# Altium PCB Main_card.PcbDoc
Units mm, origin at the board's own origin, x right, y up, seen from the top; angles counter-clockwise.
Board outline 164 x 114 mm, 2 copper layers (Top Layer, Bottom Layer); 68 components, 48 nets, 291 pads, 119 vias.
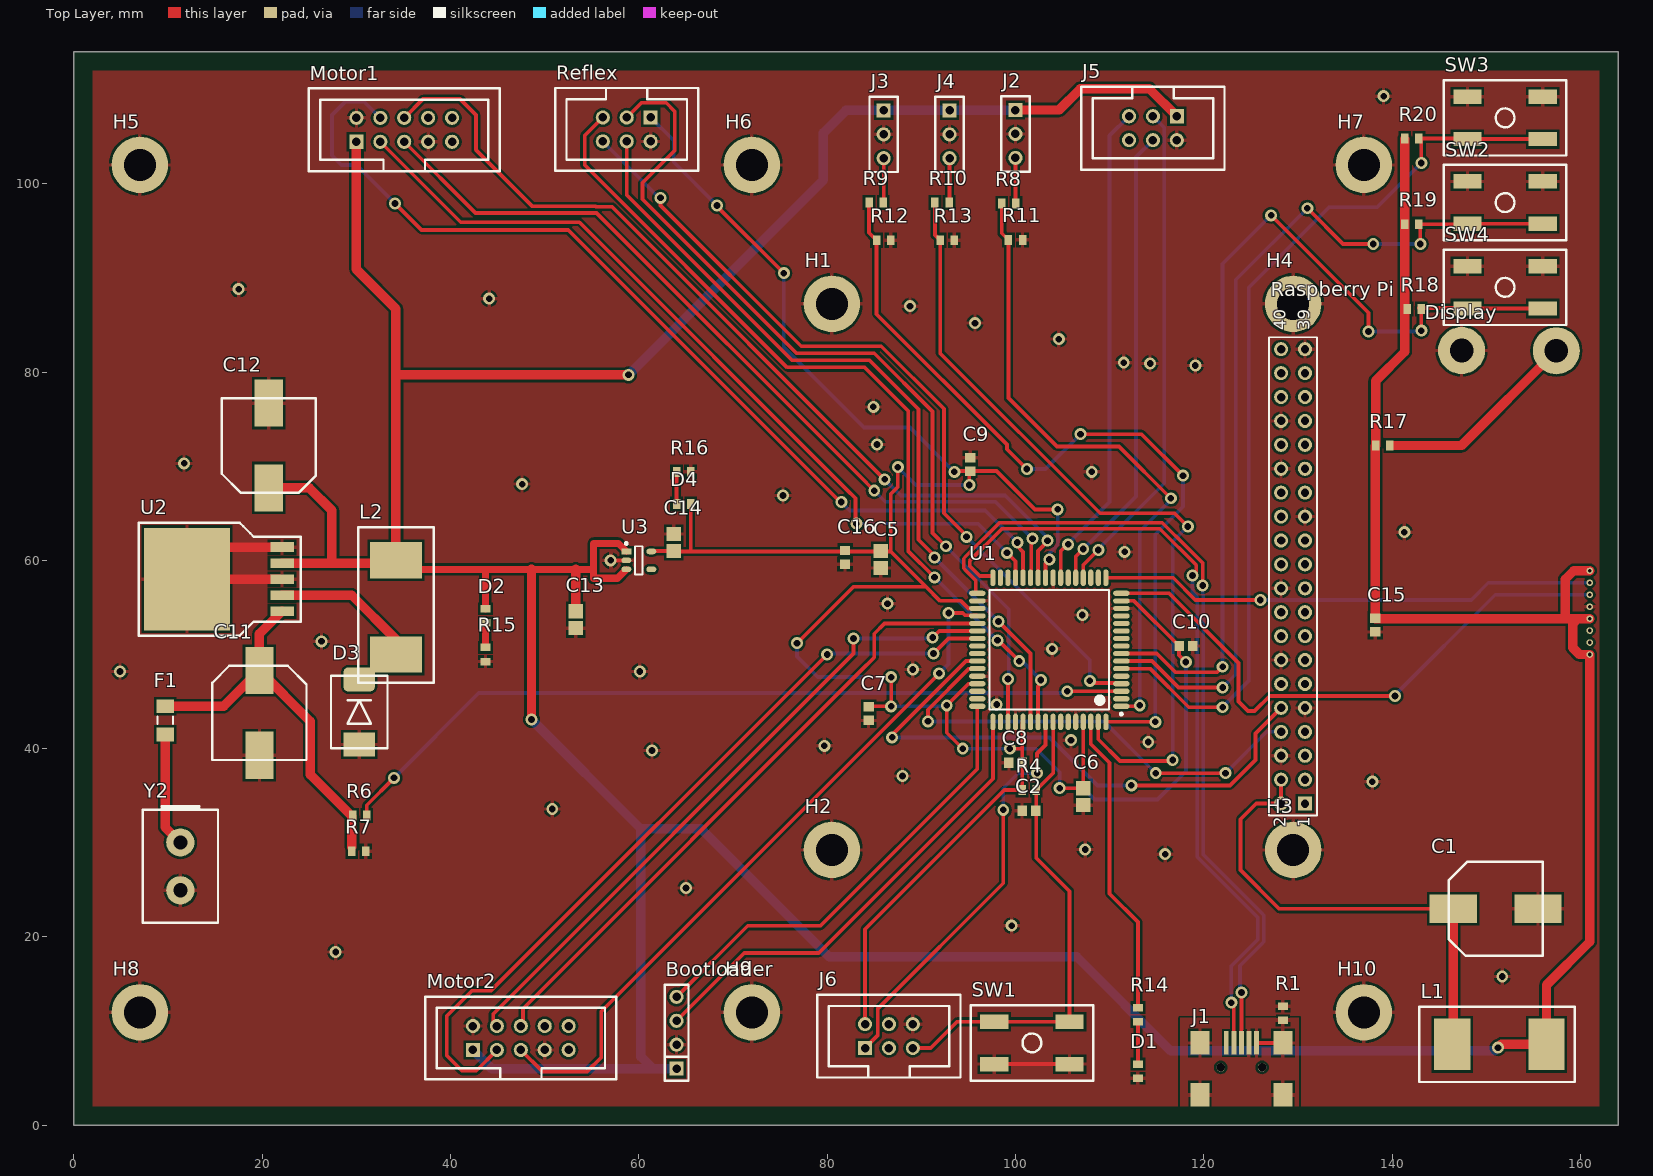
[diagram p0: Top Layer view]
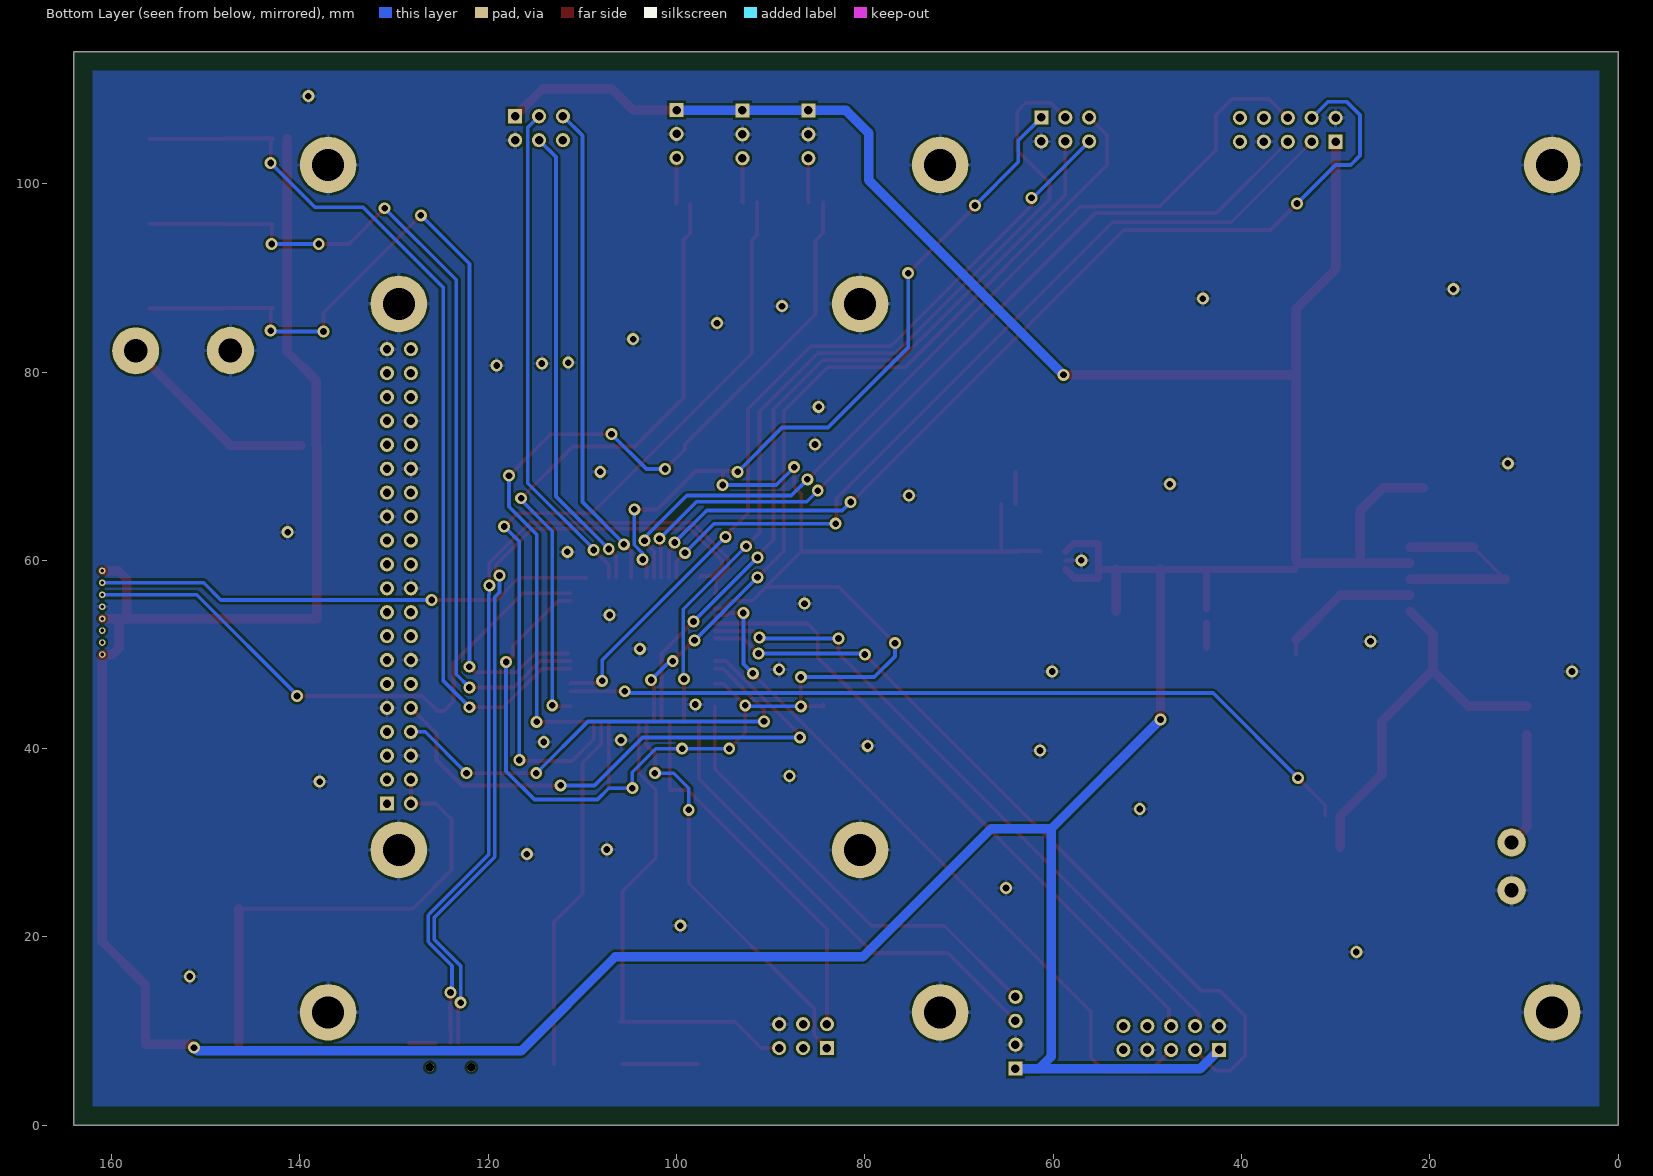
[diagram p1: Bottom Layer view, seen from below]

## Layer stack, top to bottom
Top Solder: solder mask 0.0102, Solder Resist, Dk 3.5
Top Layer: signal copper 0.0356
Dielectric1: dielectric 0.32, FR-4, Dk 4.8
Bottom Layer: signal copper 0.0356
Bottom Solder: solder mask 0.0102, Solder Resist, Dk 3.5

## Board outline
0,0 0,114 164,114 164,0

## Design rules (kind name [scope] priority, off if disabled: settings)
BoardOutlineClearance [All] p1: gap=2
Clearance [All] p1: gap=0.25
ComponentClearance [All] p1: gap=0.2 collisioncheckmode=3 verticalgap=0.2 showdistances=TRUE
DiffPairsRouting [All] p1: maxlimit=0.254 minlimit=0.254 mostfreqgap=0.254 toplayer_minwidth=0.381 toplayer_maxwidth=0.381 toplayer_prefwidth=0.381 bottomlayer_minwidth=0.381 bottomlayer_maxwidth=0.381 bottomlayer_prefwidth=0.381 maxuncoupledlength=12.7
FabricationTestPointUsage TestPointUsage [All] p1: valid=0 allowmultiple=FALSE
FabricationTestpoint Testpoint [All] p1: side=3 testpointundercomponent=TRUE minsize=1.016 maxsize=2.54 preferedsize=1.524 minholesize=0 maxholesize=1.016 preferedholesize=0.813 testpointgrid=0.025 allowsidetop=TRUE allowsidebottom=TRUE usegrid=TRUE gridtolerance=0
HoleSize [All] p1: absolutevalues=TRUE maxlimit=5 minlimit=0.025 maxpercent=80.000 minpercent=20.000
MatchedLengths [InDifferentialPair('D')] p1: tolerance=5 checknetsindiffpair=FALSE checkdiffpairvsdiffpair=TRUE checkxsignals=TRUE checkothers=TRUE
PlaneConnect [All] p1: planeconnectstyle=Relief reliefexpansion=0.508 reliefentries=4 reliefconductorwidth=0.4 reliefairgap=0.254
PolygonConnect [All] p1: connectstyle=Relief reliefconductorwidth=0.4 reliefentries=4 polygonreliefangle="90 Angle" airgapwidth=0.254
RoutingVias [All] p1: holewidth=0.711 width=1.27 viastyle="Through Hole" minholewidth=0.711 minwidth=1.27 maxholewidth=0.711 maxwidth=1.27
SilkToSolderMaskClearance SilkscreenOverComponentPads [IsPad] p1: minsilkscreentomaskgap=0.254 clearancetoexposedcopper=TRUE
SolderMaskExpansion [All] p1: expansion=0.102
Width Width_powah [InNet('5V') or InNet('VBAT')] p1: maxlimit=5 minlimit=0.25 preferedwidth=1
Width [All] p2: maxlimit=5 minlimit=0.25 preferedwidth=0.4
23 further rules are at their usual default settings.

## Classes and differential pairs
component class Main: Bootloader C1 C2 C5 C6 C7 C8 C9 C10 C11 C12 C13 C14 C16 D1 D2 D3 D4 F1 H1 H2 H3 H4 J1 J2 J3 J4 J6 L1 L2 Motor1 Motor2 R1 R4 R6 R7 R8 R9 R10 R11 R12 R13 R14 R15 R16 "Raspberry Pi" Reflex SW1 U2 U3 Y2
component class Display: C15 Display H5 H6 H7 H8 H9 H10 J5 R17 R18 R19 R20 SW2 SW3 SW4
differential pair D: +D_P -D_N

## Components (designator, comment, footprint, x,y, rotation, side; value= is the part's Value field where it differs from the comment)
Bootloader "HDR1X4" HEADER_1X4 64,9.83 r90 top
C1 "330u" CAP_FAT 151,23 r180 top
C2 "CAP" CAPC1608X08M 101.425,33.4 r0 top
C5 "CAP" CAPC2012X11M 85.7,60.1 r90 top
C6 "CAP" CAPC2012X11M 107.2,34.9 r90 top
C7 "CAP" CAPC1608X08M 84.4,43.725 r90 top
C8 "CAP" CAPC1608X08M 100.025,38.5 r0 top
C9 "CAP" CAPC1608X08M 95.2,70.175 r270 top
C10 "CAP" CAPC1608X08M 118.1,50.9 r180 top
C11 "680u" CAP_FAT 19.7,43.8 r90 top
C12 "330u" CAP_FAT 20.7,72.2 r270 top
C13 "CAP" CAPC2012X11M 53.3,53.7 r90 top
C14 "CAP" CAPC2012X11M 63.7,61.9 r270 top
C15 "CAP" CAPC1608X08M 138.2,53.125 r90 top
C16 "CAP" CAPC1608X08M 81.9,60.325 r90 top
D1 "RED" RESC1608X06M 113,5.75 r270 top
D2 "RED" RESC1608X06M 43.7,54.1 r270 top
D3 "B530C" Diode_B530C 30.3,43.9 r90 top
D4 "RED" RESC1608X06M 64.75,66 r180 top
Display "midasdisp" DISPLAY 176.875,52.54 r90 top
F1 "POLYFUSE" RESC3216X07M 9.7,43 r90 top
H1 "M3" MOUNT_M3 80.5,87.25 r0 top
H2 "M3" MOUNT_M3 80.5,29.25 r0 top
H3 "M3" MOUNT_M3 129.5,29.25 r0 top
H4 "M3" MOUNT_M3 129.5,87.25 r0 top
H5 "M3" MOUNT_M3 7,102 r0 top locked
H6 "M3" MOUNT_M3 72,102 r0 top locked
H7 "M3" MOUNT_M3 137,102 r0 top locked
H8 "M3" MOUNT_M3 7,12 r0 top locked
H9 "M3" MOUNT_M3 72,12 r0 top locked
H10 "M3" MOUNT_M3 137,12 r0 top locked
J1 "USBMINI" MINI_USB 124,6 r0 top
J2 "CNCTR" CNCTR_1X3 100,105.29 r0 top
J3 "CNCTR" CNCTR_1X3 86,105.25 r0 top
J4 "CNCTR" CNCTR_1X3 93,105.25 r0 top
J5 "IDC6" IDC6 114.6,105.9 r270 top
J6 "PDI" IDC6 86.56,9.47 r90 top
L1 "47H" DR127 151.4,8.6 r180 top
L2 "47H" DR127 34.2,55 r90 top
Motor1 "IDC10" IDC10 35.08,105.73 r90 top
Motor2 "IDC10" IDC10 47.46,9.27 r90 top
R1 "RES" RESC1608X06M 128.4,11.9 r270 top
R4 "RES" RESC1608X06M 101.45,35.6 r180 top
R6 "RES" RESC1608X06M 30.35,32.9 r180 top
R7 "RES" RESC1608X06M 30.25,29.1 r0 top
R8 "RES" RESC1608X06M 99.3,97.9 r0 top
R9 "RES" RESC1608X06M 85.2,98 r0 top
R10 "RES" RESC1608X06M 92.2,98 r0 top
R11 "RES" RESC1608X06M 100,94.04 r180 top
R12 "RES" RESC1608X06M 86,94 r180 top
R13 "RES" RESC1608X06M 92.75,94 r180 top
R14 "RES" RESC1608X06M 113,11.75 r270 top
R15 "RES" RESC1608X06M 43.7,50 r90 top
R16 "RES" RESC1608X06M 64.75,69.4 r180 top
R17 "RES" RESC1608X06M 139,72.2 r0 top
R18 "RES" RESC1608X06M 142.35,86.7 r180 top
R19 "RES" RESC1608X06M 142.1,95.7 r180 top
R20 "RES" RESC1608X06M 142.1,104.8 r180 top
"Raspberry Pi" "Header 20X2" HDR2X20 130.75,34.17 r90 top
Reflex "IDC6" IDC6 58.71,105.77 r270 top
SW1 "SWITCH" Switch_pad 101.75,8.75 r0 top
SW2 "SWITCH" Switch_pad 152,98 r180 top
SW3 "SWITCH" Switch_pad 152,107 r180 top
SW4 "SWITCH" Switch_pad 152,89 r180 top
U1 "ATxmega128A3U-AU" 64A_N 103.6,50.5 r180 top
U2 "LM2596" TO263 22.1,58 r0 top
U3 "MIC5504-3.3" SOT23-5 60,60 r0 top
Y2 "VBAT" BAT_CNCTR 11.3,27.5 r0 top

## Footprints (in the part's own frame and the unit in brackets; to place one, negate y for a bottom-side part, rotate by r counter-clockwise, add the part's x,y. Pads: shape width x height; smd on the part's side, far side on the other; paste and mask are expansions set on the pad)
64A_N [mm] "Thin QFP, 64-Leads, Body 14x14mm, Pitch 0.8mm, IPC Medium Density"
  oval 1.75x0.55 smd: 1(-7.65,6) 2(-7.65,5.2) 3(-7.65,4.4) 4(-7.65,3.6) 5(-7.65,2.8) 6(-7.65,2) 7(-7.65,1.2) 8(-7.65,0.4) 9(-7.65,-0.4) 10(-7.65,-1.2) 11(-7.65,-2) 12(-7.65,-2.8) 13(-7.65,-3.6) 14(-7.65,-4.4) 15(-7.65,-5.2) 16(-7.65,-6) 33(7.65,-6) 34(7.65,-5.2) 35(7.65,-4.4) 36(7.65,-3.6) 37(7.65,-2.8) 38(7.65,-2) 39(7.65,-1.2) 40(7.65,-0.4) 41(7.65,0.4) 42(7.65,1.2) 43(7.65,2) 44(7.65,2.8) 45(7.65,3.6) 46(7.65,4.4) 47(7.65,5.2) 48(7.65,6)
  oval 0.55x1.75 smd: 17(-6,-7.65) 18(-5.2,-7.65) 19(-4.4,-7.65) 20(-3.6,-7.65) 21(-2.8,-7.65) 22(-2,-7.65) 23(-1.2,-7.65) 24(-0.4,-7.65) 25(0.4,-7.65) 26(1.2,-7.65) 27(2,-7.65) 28(2.8,-7.65) 29(3.6,-7.65) 30(4.4,-7.65) 31(5.2,-7.65) 32(6,-7.65) 49(6,7.65) 50(5.2,7.65) 51(4.4,7.65) 52(3.6,7.65) 53(2.8,7.65) 54(2,7.65) 55(1.2,7.65) 56(0.4,7.65) 57(-0.4,7.65) 58(-1.2,7.65) 59(-2,7.65) 60(-2.8,7.65) 61(-3.6,7.65) 62(-4.4,7.65) 63(-5.2,7.65) 64(-6,7.65)
  silkscreen extent -7.78,-6.35 6.35,6.95, body extent -7,-7 7,7, height 1.2
BAT_CNCTR [mm]
  round 3 hole 1.5: 1(0,2.54) 2(0,-2.54)
  silkscreen extent -4,-6 4,6.4
CAP_FAT [mm] "Feta kondingar"
  rect 5x3 smd: 1(-4.5,0) 2(4.5,0)
  silkscreen extent -5,-5 5,5
CAPC1608X08M [mm] "Chip Capacitor, 2-Leads, Body 1,60x0,80mm, IPC Low Density"
  rect 1x1.1 smd: 1(-0.725,0) 2(0.725,0)
  body extent -0.87,-0.48 0.87,0.47, height 0.85
CAPC2012X11M [mm] "Chip Capacitor, 2-Leads, Body 2,00x1,25mm, IPC Low Density"
  rect 1.5x1.55 smd: 1(-0.9,0) 2(0.9,0)
  body extent -1.1,-0.72 1.1,0.72, height 1.1
CNCTR_1X3 [mm] "3-pin connector"
  rect 1.5x1.5 hole 0.9: 1(0,2.54)
  round 1.5 hole 0.9: 2(0,0) 3(0,-2.54)
  silkscreen extent -1.5,-4 1.5,4
Diode_B530C [mm] "Schottky barrier rectifier"
  rect 2.524x3.3 smd: 1(-3.45,0)
  rrect35% 2.524x3.3 smd: 2(3.45,0)
  silkscreen extent -3.85,-3 3.85,3
DISPLAY [mm]
  round 0.7 hole 0.4: 1(-2.54,15.875) 2(-1.27,15.875) 3(0,15.875) 4(1.27,15.875) 5(2.54,15.875) 6(3.81,15.875) 7(5.08,15.875) 8(6.35,15.875)
  round 5 hole 2.5: 9(29.718,19.431) 10(29.75,29.5)
  body extent -20.96,16.51 30.1,33.66, height 6.3
DR127 [mm] "spole"
  rect 3.85x5.5 smd: 1(-5,0) 2(5,0)
  silkscreen extent -8,-4 8.5,4
HDR2X20 [mm] "Connector; Header; 20x2 Position"
  rect 1.5x1.5 hole 0.9: 1(0,0)
  round 1.5 hole 0.9: 2(0,2.54) 3(2.54,0) 4(2.54,2.54) 5(5.08,0) 6(5.08,2.54) 7(7.62,0) 8(7.62,2.54) 9(10.16,0) 10(10.16,2.54) 11(12.7,0) 12(12.7,2.54) 13(15.24,0) 14(15.24,2.54) 15(17.78,0) 16(17.78,2.54) 17(20.32,0) 18(20.32,2.54) 19(22.86,0) 20(22.86,2.54) 21(25.4,0) 22(25.4,2.54) 23(27.94,0) 24(27.94,2.54) 25(30.48,0) 26(30.48,2.54) 27(33.02,0) 28(33.02,2.54) 29(35.56,0) 30(35.56,2.54) 31(38.1,0) 32(38.1,2.54) 33(40.64,0) 34(40.64,2.54) 35(43.18,0) 36(43.18,2.54) 37(45.72,0) 38(45.72,2.54) 39(48.26,0) 40(48.26,2.54)
  silkscreen extent -1.27,-1.27 49.53,3.81
HEADER_1X4 [mm]
  rect 1.5x1.5 hole 0.9: 1(-3.81,0)
  round 1.5 hole 0.9: 2(-1.27,0) 3(1.27,0) 4(3.81,0)
  silkscreen extent -5.08,-1.27 5.08,1.27
IDC6 [mm]
  rect 1.5x1.5 hole 0.9: 1(-1.27,2.54)
  round 1.5 hole 0.9: 2(1.27,2.54) 3(-1.27,0) 4(1.27,0) 5(-1.27,-2.54) 6(1.27,-2.54)
  silkscreen extent -4.4,-7.6 4.4,7.6, body extent -4.4,-7.6 4.4,7.6, height 9.1
IDC10 [mm]
  rect 1.5x1.5 hole 0.9: 1(-1.27,5.08)
  round 1.5 hole 0.9: 2(1.27,5.08) 3(-1.27,2.54) 4(1.27,2.54) 5(-1.27,0) 6(1.27,0) 7(-1.27,-2.54) 8(1.27,-2.54) 9(-1.27,-5.08) 10(1.27,-5.08)
  silkscreen extent -4.4,-10.14 4.4,10.14, body extent -4.4,-10.14 4.4,10.14, height 9.1
MINI_USB [mm]
  rect 0.5x2.5 smd: 1(-1.6,2.75) 2(-0.8,2.75) 3(0,2.75) 4(0.8,2.75) 5(1.6,2.75)
  round 0.9 hole 0.9: 10(-2.2,0.15) 11(2.2,0.15)
  rect 2x2.5 smd: C(-4.4,-2.75) C(-4.4,2.75) C(4.4,-2.75) C(4.4,2.75)
MOUNT_M3 [mm]
  round 6 hole 3.4: 1(0,0)
  body extent -2.75,-2.75 2.75,2.75, height 3
RESC1608X06M [mm] "Chip Resistor, 2-Leads, Body 1,60x0,82mm, IPC Low Density"
  rect 0.8x1.05 smd: 1(-0.75,0) 2(0.75,0)
  body extent -0.85,-0.48 0.85,0.48, height 0.6
RESC3216X07M [mm] "Chip Resistor, 2-Leads, Body 3,20x1,60mm, IPC Low Density"
  rect 1.45x1.85 smd: 1(-1.5,0) 2(1.5,0)
  silkscreen extent -0.4,-0.82 0.4,0.82, body extent -1.68,-0.87 1.68,0.87, height 0.71
SOT23-5 [mm]
  rect 1.05x0.6 smd: 1(-1.325,0.95)
  oval 1.05x0.6 smd: 2(-1.325,0) 3(-1.325,-0.95) 4(1.325,-0.95) 5(1.325,0.95)
  silkscreen extent -1.45,-1.5 0.4,1.92, body extent -0.8,-1.5 0.8,1.5, height 1.45
Switch_pad [mm]
  rect 3x1.524 smd: 1(-4,2.25) 1(4,2.25) 2(-4,-2.25) 2(4,-2.25)
  silkscreen extent -6.5,-4 6.5,4
TO263 [mm]
  rect 2.5x1.05 smd: 1(0,-3.4) 2(0,-1.7) 3(0,0) 4(0,1.7) 5(0,3.4)
  rect 9.1x10.9 smd: PAD(-10.1,0)
  silkscreen extent -15.2,-6 2,6

## Part data
Bootloader: "4pin header"
C1 C11 C12: library part POLCAP
C2 C5 C6 C7 C8 C9 C10 C13 C14 C15 C16: "Capacitor"
D1 D2 D4: library part LED
D3: library part Diode_B530C
F1: "Polyfuse"
H1 H2 H3 H4 H5 H6 H7 H8 H9 H10: library part MOUNT_M3
J1: library part MINI_USB
J2 J3 J4: library part Connector, "3pin connector"
J5 Reflex: "6pin IDC connector"
J6: library part IDC6, "6pin IDC connector"
L1 L2: library part DR127
Motor1 Motor2: "10pin IDC connector"
R1 R4 R6 R7 R8 R9 R10 R11 R12 R13 R14 R15 R16 R17 R18 R19 R20: "Resistor"
"Raspberry Pi": "Header, 20-Pin, Dual row"
SW1 SW2 SW3 SW4: library part Switch, "Switch"
U1: "8/16-bit AVR XMEGA A4 Microcontroller, 1.6-3.6V, 32MHz, 128K + 8KB Flash, 2K EEPROM, 8K SRAM, 64-pin TQFP, Industrial Grade (-40°C to 85°C)"
Y2: library part BAT_CNCTR, "2-pin batteri kontakt"

## Via types
v1: diameter 1.27, hole 0.711, Top Layer to Bottom Layer, 119 vias

## Nets (pads, with @x,y where several pads share a name; then routed paths per layer and width w, separated by ;. In a path a pad name is that pad's centre, name@x,y a point inside that pad or via, vN(x,y) a via of type N, cw(c..) or ccw(c..) an arc to the next point about the centre after c; other vN are vias at no path point)
3V3: C5.2 C6.2 C7.2 C8.2 C9.2 C10.2 C14.2 C16.2 D4.1 J6.2 R4.2 Reflex.1 U1.15 U1.25 U1.35 U1.45 U1.53 U1.61 U3.5 | length 286.5
  Top Layer w0.4: U3.5 61.375,61 C14.2 ; C14.2@63.7,60.95 65.5,60.95 ; D4.1 65.5,60.95 ; v1(68.3,97.7) 68.2,97.7 v1(75.4,90.5) ; v1(76.8,51.2) 82.8,57.2 90.5,57.2 ; J6.2 84.02,20.82 98.8,35.6 R4.2 100.725,35.625 100.725,40 ; C7.2 C7.2@84.4,44.5 ; C7.2@84.4,44.7 C7.2@84.4,44.5 ; v1(86.8,47.6) v1(86.8,44.5) C7.2@84.4,44.5 ; v1(87.5,69.9) 87.5,67.8 86.75,67.05 86.75,60.95 ; v1(93.5,69.4) 93.6,69.5 98,69.5 102.085,65.415 v1(104.485,65.415) ; v1(94.4,40) 92.7,41.7 v1(92.7,44.6) 95,46.9 U1.45 ; v1(95.1,68) 95.1,69.35 C9.2 ; U1.35 95,54.9 94.2,55.7 92,55.7 90.5,57.2 ; v1(99.4,40) 100.725,40 ; U1.53 100.725,42.775 100.725,40 ; U1.25 103.2,59.7 v1(103.6,60.1) ; v1(104.7,35.8) C6.2 107.2,39.1 U1.61 ; U1.15 112.6,55.7 C10.2@117.4,50.9 ; C10.2 117.375,49.925 v1(118.1,49.2) ; 65.5,60.95 86.75,60.95 ; 86.75,60.95 90.5,57.2
  Bottom Layer w0.4: Reflex.1 63.7,104.59 63.7,102.3 v1(68.3,97.7) ; v1(75.4,90.5) 75.4,82.6 83.9,74.1 88.8,74.1 v1(93.5,69.4) ; v1(76.8,51.2) 76.8,49.8 79,47.6 v1(86.8,47.6) ; v1(86.8,44.5) 87.3,44.5 92.6,44.5 v1(92.7,44.6) ; v1(87.5,69.9) 89.4,68 v1(95.1,68) ; v1(94.4,40) v1(99.4,40) 102.2,40 104.7,37.5 v1(104.7,35.8) 107.2,35.8 108.4,34.6 115.1,34.6 118.1,37.6 v1(118.1,49.2) ; v1(103.6,60.1) 103.6,60.766 104.485,61.65 v1(104.485,65.415)
5V: Bootloader.1 C12.2 C13.2 C15.2 D2.1 Display.1 Display.4 Display.8 J2.1 J3.1 J4.1 J5.1 L1.1 L2.2 Motor1.1 Motor2.1 R17.1 R18.2 R19.2 R20.2 U2.4 U3.1 U3.3 | length 530.4
  Top Layer w0.75: L2.2@34.3,59.05 43.7,59.05 ; D2.1 43.7,59.05 ; U3.3 57.725,58.1 55.2,58.1 55.2,59.05 ; U3.1 57.825,61.8 55.2,61.8 55.2,59.05 ; 43.7,59.05 48.6,59.05 53.3,59.05 55.2,59.05
  Top Layer w1: C12.2 25,67.7 27.4,65.3 27.4,59.7 ; U2.4 27.4,59.7 ; Motor1.1 30,90.9 34.2,86.7 34.2,79.8 ; v1(48.6,43.1) 48.6,59.05 ; C13.2 53.3,59.05 ; v1(58.9,79.7) 34.3,79.7 34.2,79.8 ; J2.1 104.63,107.83 106.9,110.1 114.21,110.1 J5.1 ; C15.2@138.19,53.81 158.4,53.81 ; C15.2 138.2,72.15 R17.1 138.25,79.05 141.35,82.15 R19.2 R20.2 ; v1(151.25,8.25) 151.6,8.6 L1.1 156.4,14.9 161,19.5 Display.1 159.9,50 159.2,50.7 159.2,53.3 159.71,53.81 ; Display.4 159.71,53.81 ; Display.8 159.29,58.89 158.4,58 158.4,53.81 ; 27.4,59.7 33.9,59.7 L2.2 34.2,79.8 ; 158.4,53.81 159.71,53.81
  Bottom Layer w1: Motor2.1 44.36,6.02 61.48,6.02 ; v1(48.6,43.1) 60.2,31.5 ; v1(58.9,79.7) 79.6,100.4 79.6,105.4 81.99,107.79 J3.1 J4.1 99.96,107.79 J2.1 ; Bootloader.1 61.48,6.02 ; v1(151.25,8.25) 150.9,7.9 116.5,7.9 106.5,17.9 80.2,17.9 66.6,31.5 60.2,31.5 ; 60.2,31.5 60.2,7.3 61.48,6.02
B_RX: Bootloader.4 U1.48 | length 48.6
  Top Layer w0.4: Bootloader.4 71.56,21.2 79.3,21.2 95.95,37.85 U1.48
B_TX: Bootloader.3 U1.49 | length 50.3
  Top Layer w0.4: Bootloader.3 71.2,18.3 79.1,18.3 97.6,36.8 U1.49
CS: J5.3 U1.20 | length 53.1
  Top Layer w0.4: U1.20 107.2,59.5 v1(108.8,61.1)
  Bottom Layer w0.4: v1(108.8,61.1) 108.8,61.2 115.8,68.2 115.8,105.97 J5.3
D_N: J1.2 U1.32 | length 85.7
  Top Layer w0.381: U1.32 97.41,58.341 96.209,58.341 95.125,59.425 95.125,59.925 98.565,63.365 101.144,63.365 101.155,63.375 102.045,63.375 ; 102.046,63.375 102.245,63.375 102.256,63.365 115.335,63.365 119.2,59.5 119.2,58.8 v1(118.8,58.4) ; v1(122.922,13.022) 123.2,12.745 J1.2
  Bottom Layer w0.381: v1(118.8,58.4) 118.798,58.398 118.798,56.602 119.3,56.1 119.3,28.502 125.751,22.051 125.751,19.751 122.921,16.921 v1(122.922,13.022) v1(122.922,13.022)
D_P: J1.3 U1.33 | length 88
  Top Layer w0.381: U1.33 95.76,56.691 95.76,57.891 94.675,58.975 94.49,59.161 94.49,60.188 94.675,60.374 98.302,64 100.881,64 100.891,64.01 102.309,64.01 ; 102.309,64.01 102.508,64.01 102.519,64 115.598,64 118.324,61.275 119.88,59.719 v1(119.878,57.322) v1(119.878,57.322) ; v1(124,14.1) 124.002,14.098 124.002,10.192 124,10.191 J1.3 J1.3@124.095,8.845
  Bottom Layer w0.381: v1(119.878,57.322) 119.878,56.42 119.935,56.363 119.935,28.765 126.2,22.5 126.386,22.314 126.386,19.488 126.2,19.302 123.849,16.951 123.849,14.251 v1(124,14.1)
GND: "Raspberry Pi.6" "Raspberry Pi.9" "Raspberry Pi.14" "Raspberry Pi.20" "Raspberry Pi.25" "Raspberry Pi.30" "Raspberry Pi.34" "Raspberry Pi.39" Bootloader.2 C1.1 C2.1 C5.1 C6.1 C7.1 C8.1 C9.1 C10.1 C11.1 C12.1 C13.1 C14.1 C15.1 C16.1 D1.2 D3.1 Display.5 Display.10 H1.1 H2.1 H3.1 H4.1 H5.1 H6.1 H7.1 H8.1 H9.1 H10.1 J2.2 J3.2 J4.2 J5.2 J6.6 Motor1.2 Motor1.7 Motor2.2 Motor2.7 R1.1 R7.2 R11.1 R12.1 R13.1 R15.1 R16.1 Reflex.2 SW1.2 SW2.2 SW3.2 SW4.2 U1.14 U1.24 U1.34 U1.44 U1.52 U1.60 U2.3 U2.5 U2.PAD U3.2 Y2.2 | length 31.3
  Top Layer w0.4: U2.PAD U2.PAD@15.4,61.4 ; v1(57,60) U3.2 ; SW1.2@97.75,6.5 SW1.2@105.75,6.5
  Top Layer w1: U2.PAD U2.3 ; U2.PAD@15.4,61.4 U2.5
  other v1: 151.7,15.8 27.8,18.4 99.6,21.2 65,25.2 115.9,28.8 107.4,29.3 50.8,33.6 137.9,36.5 88,37.1 61.4,39.8 79.7,40.3 114.1,40.7 105.9,40.9 98,44.7 4.9,48.2 60.1,48.2 89.1,48.4 103.9,50.6 26.3,51.4 107.1,54.2 86.4,55.4 111.6,60.9 141.3,63 75.3,66.9 47.6,68.1 108.1,69.4 11.7,70.3 85.3,72.3 84.9,76.3 119.1,80.7 114.3,80.9 111.5,81 104.6,83.5 95.7,85.2 88.8,87 44.1,87.8 17.5,88.8 139.1,109.3
M1_PC0: Motor1.5 U1.27 | length 88.4
  Top Layer w0.4: Motor1.5 42.64,96.9 55.5,96.9 83.398,69.002 83.398,68.998 83.402,68.998 v1(85,67.4) ; U1.27 101.675,58.225 101.675,62.175 v1(101.8,62.3)
  Bottom Layer w0.4: v1(85,67.4) 86.165,66.235 97.865,66.235 v1(101.8,62.3)
M1_PC1: Motor1.6 U1.26 | length 95.5
  Top Layer w0.4: Motor1.6 37.08,109 41,109 42.7,107.3 42.7,103.6 48.7,97.6 55.4,97.6 55.45,97.55 57.15,97.55 v1(86.1,68.6) ; U1.26 102.4,61 103.4,62 v1(103.4,62.1)
  Bottom Layer w0.4: v1(86.1,68.6) 87.815,66.885 98.915,66.885 103.5,62.3 103.3,62.1 v1(103.4,62.1)
M1_RX0: Motor1.4 U1.28 | length 104.5
  Top Layer w0.4: v1(34.1,97.9) 36.9,95.1 52.5,95.1 v1@81.45,66.15 ; v1(100.2,61.9) 100.2,61.5 100.8,60.9 U1.28
  Bottom Layer w0.4: Motor1.4 30.84,108.7 28.8,108.7 27.4,107.3 27.4,103 28.4,102 30,102 v1(34.1,97.9) ; v1(81.5,66.2) 82.4,65.3 96.8,65.3 v1(100.2,61.9)
M1_TX0: Motor1.3 U1.29 | length 89.2
  Top Layer w0.4: Motor1.3 41.08,95.92 53.68,95.92 82.121,67.479 83.011,66.589 83.011,63.989 v1(83.1,63.9) ; v1(99.1,60.8) 100,59.9 U1.29
  Bottom Layer w0.4: v1(83.1,63.9) 96,63.9 v1(99.1,60.8)
M2_PE0: Motor2.5 U1.36 | length 75.8
  Top Layer w0.4: Motor2.5 49.76,5.7 54.5,5.7 56,7.2 56,12.1 v1(91.9,48) ; v1(92.9,54.4) 94.4,54.4 94.625,54.175 95.875,54.175 U1.36
  Bottom Layer w0.4: v1(91.9,48) 92.9,49 v1(92.9,54.4)
M2_PE1: Motor2.6 U1.37 | length 68.8
  Top Layer w0.4: Motor2.6@47.7,10.3 47.7,12.381 83.45,48.131 83.45,48.15 85,49.7 85,52.2 86.1,53.3 U1.37
M2_RX1: Motor2.4 U1.38 | length 70.1
  Top Layer w0.4: Motor2.4@44.53,10.93 44.53,11.83 82.8,50.1 v1(82.8,51.7) ; v1(91.2,51.8) 91.9,52.5 U1.38
  Bottom Layer w0.4: v1(82.8,51.7) 91.1,51.7 v1(91.2,51.8)
M2_TX1: Motor2.3 U1.39 | length 84.1
  Top Layer w0.4: Motor2.3 42.72,5.8 41.2,5.8 39.6,7.4 39.6,11.6 42.3,14.3 44.3,14.3 v1(80,50) ; v1(91.3,50.1) 92.9,51.7 U1.39
  Bottom Layer w0.4: v1(80,50) 80.1,50.1 v1(91.3,50.1)
MOSI: J5.4 U1.21 | length 49.9
  Top Layer w0.4: U1.21 106.4,60.4 v1(107.2,61.2)
  Bottom Layer w0.4: v1(107.2,61.2) 112.8,66.8 112.8,102.83 J5.4
NetC1_2: "Raspberry Pi.2" "Raspberry Pi.4" C1.2 L1.2 | length 51.7
  Top Layer w0.4: 128.21,36.71 128.21,34.17 125.57,34.17 123.9,32.5 123.9,27.1 128,23 C1.2 ; L1.2 L1.2@146.5,8.7
  Top Layer w1: L1.2@146.5,8.7 C1.2
NetC11_2: C11.2 F1.2 R6.2 R7.1 U2.1 | length 41.7
  Top Layer w1: F1.2 15.9,44.5 C11.2 ; U2.1 19.7,52.2 C11.2 ; R7.1@29.525,29.525 29.525,32.825 25.1,37.25 25.1,42.9 C11.2
NetD1_1: D1.1 R14.2 | length 4.5
  Top Layer w0.4: D1.1 R14.2
NetD2_2: D2.2 R15.2 | length 2.6
  Top Layer w0.75: R15.2 D2.2
NetD3_2: D3.2 L2.1 U2.2 | length 15.6
  Top Layer w0.4: L2.1 L2.1@34.2,51.6
  Top Layer w1: U2.2 29.5,56.3 L2.1@34.2,51.6
NetD4_2: D4.2 R16.2 | length 3.4
  Top Layer w0.4: D4.2 R16.2
NetDisplay_9: Display.9 R17.2 | length 21.7
  Top Layer w1: R17.2@139.9,72.2 147.386,72.2 Display.9
NetJ1_4: J1.4 J1.5 J1.C R1.2 | length 2.8
  Top Layer w0.4: J1.5 J1.C@128.4,8.75
NetJ2_3: J2.3 R8.2 | length 4.9
  Top Layer w0.4: J2.3 100,97.95 R8.2
NetJ3_3: J3.3 R9.2 | length 4.7
  Top Layer w0.4: R9.2 86,98.05 J3.3
NetJ4_3: J4.3 R10.2 | length 4.7
  Top Layer w0.4: R10.2 93,98.05 J4.3
NetR14_1: R14.1 U1.62 | length 32.4
  Top Layer w0.4: U1.62 108,40.5 110,38.5 110,24.6 113,21.6 R14.1
NetReflex_3: Reflex.3 U1.51 | length 93.3
  Top Layer w0.4: Reflex.3 60.27,108.6 62.9,108.6 63.8,107.7 63.8,103.5 60.4,100.1 60.4,98.35 76.75,82 85,82 91.2,75.8 91.2,62.9 v1(92.6,61.5) ; U1.51 v1(99.2,47.4)
  Bottom Layer w0.4: v1(92.6,61.5) 99.285,54.815 99.285,47.485 v1(99.2,47.4)
NetReflex_4: Reflex.4 U1.54 | length 84.2
  Top Layer w0.4: Reflex.4 58.71,98.79 76.25,81.25 84.5,81.25 89.7,76.05 89.7,62.2 91.4,60.5 v1(91.4,60.3) ; v1(98.2,53.5) 101.6,50.1 U1.54
  Bottom Layer w0.4: v1(91.4,60.3) v1(98.2,53.5)
NetReflex_5: Reflex.5 U1.55 | length 90.2
  Top Layer w0.4: Reflex.5 54.25,105.12 54.25,102 75.75,80.5 84,80.5 88.6,75.9 88.6,61 v1(91.4,58.2) ; v1(98.1,51.5) 98.2,51.5 v1(100.4,49.3) ; U1.55 102.4,46.6 102.7,46.9 v1(102.7,47.3)
  Bottom Layer w0.4: v1(91.4,58.2) v1(98.1,51.5) ; v1(100.4,49.3) 100.7,49.3 v1(102.7,47.3)
PA1: R10.1 R13.2 U1.63 | length 86.4
  Top Layer w0.4: R10.1 91.45,94.55 R13.2 92,82 109,65 116.9,65 v1(118.3,63.6) ; U1.63 108.8,41 111.1,38.7 116.6,38.7 v1(116.7,38.8)
  Bottom Layer w0.4: v1(116.7,38.8) 116.7,62 v1(118.3,63.6)
PA2: R9.1 R12.2 U1.64 | length 87.8
  Top Layer w0.4: R9.1 84.45,94.8 R12.2 85.25,86.15 99.1,72.3 99.1,71.8 v1(101.2,69.7) ; v1(106.9,73.4) 113.4,73.4 v1(117.8,69) ; U1.64 v1(114.85,42.85)
  Bottom Layer w0.4: v1(101.2,69.7) 103.2,69.7 v1(106.9,73.4) ; v1(114.85,42.85) 114.85,62.75 117.8,65.7 v1(117.8,69)
PA3: R8.1 R11.2 U1.1 | length 68
  Top Layer w0.4: R8.1 98.55,94.74 R11.2 99.25,77.25 104.4,72.1 111,72.1 v1(116.5,66.6) ; U1.1 113.2,44.5 v1(113.2,44.6)
  Bottom Layer w0.4: v1(113.2,44.6) 113.2,63.1 116.5,66.4 v1(116.5,66.6)
PA5_REG: R6.1 U1.3 | length 86.3
  Top Layer w0.4: R6.1 31.1,34 v1(34,36.9) ; v1(105.5,46.1) U1.3
  Bottom Layer w0.4: v1(34,36.9) 43,45.9 105.3,45.9 v1(105.5,46.1)
PA6_REFL: Reflex.6 U1.4 | length 88.3
  Top Layer w0.4: v1(62.3,98.5) 62.3,97.7 77.25,82.75 85.75,82.75 92.4,76.1 92.4,65 95.05,62.35 95,62.3 94.8,62.1 v1(94.8,62.5) ; v1(107.9,47.2) 108.125,46.975 111.175,46.975 U1.4
  Bottom Layer w0.4: Reflex.6 62.17,98.5 v1(62.3,98.5) ; v1(94.8,62.5) 107.9,49.4 v1(107.9,47.2)
PB0: R20.1 SW3.1 U1.6 | length 97.8
  Top Layer w0.4: U1.6 114.3,48.5 118.4,44.4 v1(122,44.4) ; v1(143.1,102.2) 143.1,104.55 R20.1 147.95,104.8 148,104.75 SW3.1@156,104.75
  Bottom Layer w0.4: v1@122,44.434 124.751,47.185 124.785,47.185 124.785,88.985 133.3,97.5 138.4,97.5 v1(143.1,102.2)
PB1: R19.1 SW2.1 U1.7 | length 95.4
  Top Layer w0.4: U1.7 114.5,49.3 117.3,46.5 v1(122,46.5) ; v1(131,97.4) 134.8,93.6 v1(138,93.6) ; v1(143,93.6) 143,95.55 R19.1 147.95,95.7 148,95.75 SW2.1@156,95.75
  Bottom Layer w0.4: v1(122,46.5) 123.4,47.9 123.4,89.8 v1(131,97.4) ; v1(138,93.6) v1(143,93.6)
PB2: R18.1 SW4.1 U1.8 | length 99.4
  Top Layer w0.4: U1.8@111.5,50.1 115,50.1 116.985,48.115 121.415,48.115 v1(122,48.7) ; v1(127.15,96.65) 137.5,86.3 v1(137.5,84.3) ; R18.1@142.85,86.8 147.95,86.8 148,86.75 SW4.1@156,86.75 ; v1(143.1,84.4) R18.1
  Bottom Layer w0.4: v1(122,48.7) 122,91.5 v1(127.15,96.65) ; v1(137.5,84.3) 143,84.3 v1(143.1,84.4)
PDI: J6.1 U1.56 | length 43.8
  Top Layer w0.4: J6.1 85.36,9.54 85.36,12.36 98.7,25.7 v1(98.7,33.5) ; v1(102.3,37.4) 102.3,39.5 103.2,40.4 U1.56
  Bottom Layer w0.4: v1(98.7,33.5) 98.7,35.8 100.3,37.4 v1(102.3,37.4)
RASP_RX: "Raspberry Pi.10" U1.42 | length 61
  Top Layer w0.4: v1(86.9,41.2) 86.9,41.466 94.734,49.3 U1.42 ; v1(112.3,36.1) 122.8,36.1 125.5,38.8 125.5,41.62 128.21,44.33
  Bottom Layer w0.4: v1(86.9,41.2) 103.6,41.2 108.7,36.1 v1(112.3,36.1)
RASP_TX: "Raspberry Pi.8" U1.43 | length 49.9
  Top Layer w0.4: v1(90.7,42.9) 90.7,44.134 95.066,48.5 U1.43 ; v1(114.9,37.4) v1(122.3,37.4)
  Bottom Layer w0.4: v1(90.7,42.9) 109.4,42.9 v1(114.9,37.4) ; v1(122.3,37.4) 126.69,41.79 128.21,41.79
RESET: C2.2 J6.5 R4.1 SW1.1 U1.57 | length 52.1
  Top Layer w0.4: J6.5 91,8.2 93.8,11 97.75,11 SW1.1@105.75,11 ; U1.57@104.075,42.775 U1.57 104,37.4 R4.1 102.2,28.4 105.75,24.85 105.75,11.25 SW1.1@106,11
SCK: J5.5 U1.23 | length 52.1
  Top Layer w0.4: U1.23 104.8,61 105.5,61.7 v1(105.6,61.7)
  Bottom Layer w0.4: v1(105.6,61.7) 105.6,61.8 110,66.2 110,105.11 J5.5
SCL: Display.7 U1.17 | length 53.1
  Top Layer w0.4: U1.17 116.75,58.15 119.1,55.8 v1(126,55.8)
  Bottom Layer w0.4: v1(126,55.8) 148.4,55.8 150.22,57.62 Display.7
SDA: Display.6 U1.16 | length 62.5
  Top Layer w0.4: U1.16 116.3,56.5 123.7,49.1 123.7,45 124.7,44 125.4,44 127,45.6 v1(140.3,45.6)
  Bottom Layer w0.4: v1@140.25,45.65 150.95,56.35 Display.6
VBAT: F1.1 Y2.1 | length 12.1
  Top Layer w1: F1.1 9.7,31.64 Y2.1
pads on no net: "Raspberry Pi.1" "Raspberry Pi.3" "Raspberry Pi.5" "Raspberry Pi.7" "Raspberry Pi.11" "Raspberry Pi.12" "Raspberry Pi.13" "Raspberry Pi.15" "Raspberry Pi.16" "Raspberry Pi.17" "Raspberry Pi.18" "Raspberry Pi.19" "Raspberry Pi.21" "Raspberry Pi.22" "Raspberry Pi.23" "Raspberry Pi.24" "Raspberry Pi.26" "Raspberry Pi.27" "Raspberry Pi.28" "Raspberry Pi.29" "Raspberry Pi.31" "Raspberry Pi.32" "Raspberry Pi.33" "Raspberry Pi.35" "Raspberry Pi.36" "Raspberry Pi.37" "Raspberry Pi.38" "Raspberry Pi.40" Display.2 Display.3 J1.1 J1.10 J1.11 J5.6 J6.3 J6.4 Motor1.8 Motor1.9 Motor1.10 Motor2.8 Motor2.9 Motor2.10 U1.2 U1.5 U1.9 U1.10 U1.11 U1.12 U1.13 U1.18 U1.19 U1.22 U1.30 U1.31 U1.40 U1.41 U1.46 U1.47 U1.50 U1.58 U1.59 U3.4

## Polygon pours and split planes (outlines as drawn)
GND on Bottom Layer "GND_L02_P002" (solid, pour order 2): 0,0 0,114 164,114 164,0
NetJ1_4 on Top Layer "Top Layer-No Net" (solid, pour order 0): 117.5,2 117.5,11.4 130.1,11.4 130.1,2
GND on Top Layer "GND_L01_P001" (solid, pour order 1): 0,0 0,114 164,114 164,0

## Silkscreen, mask and mechanical layers (free items; w line width, h text height)
Mechanical 16:
  drawing of 1873 lines, arcs and shapes, not listed
  text "1" at -27.279,137.511 h1.78
  text "2" at 45.365,137.511 h1.78
  text "3" at 118.517,137.511 h1.78
  text "4" at 191.415,137.511 h1.78
  text "A" at -61.62,114.499 h1.78
  text "A" at 225.4,114.499 h1.78
  text "B" at -61.62,66.442 h1.78
  text "B" at 225.4,66.442 h1.78
  text "C" at -61.62,17.928 h1.78
  text "C" at 225.4,17.928 h1.78
  text "ENGINEER:" at 110.465,-19.08 h1.14
  text "TITLE:" at 148.565,-19.08 h1.14
  text "PCB DESIGNER:" at 110.465,-26.573 h1.14
  text "D" at -61.62,-30.078 h1.78
  text "D" at 225.4,-30.078 h1.78
  text "DATE:" at 110.465,-34.32 h1.14
  text "PART NO.:" at 148.565,-34.32 h1.14
  text "REV:" at 201.905,-34.32 h1.14
  text "Altium Limited" at 77.445,-36.86 h1.78
  text ".PRINT_DATE" at 111.735,-37.368 h1.78
  text "12a Rodborough Rd" at 77.445,-39.4 h1.78
  text "Frenchs Forest" at 77.445,-41.94 h1.78
  text "FILE NAME:" at 110.465,-41.94 h1.14
  text "DWG NO:" at 148.565,-41.94 h1.14
  text "SCALE:" at 201.905,-41.94 h1.14
  text "NSW 2086" at 77.445,-44.48 h1.78
  text ".PCB_FILE_NAME_NO_PATH" at 111.735,-44.988 h1.78
  text "1" at -27.279,-50.449 h1.78
  text "2" at 45.365,-50.449 h1.78
  text "3" at 118.517,-50.449 h1.78
  text "4" at 191.415,-50.449 h1.78

## Text inside footprints (layer, text, board x,y; h text height)
"Raspberry Pi": Top Overlay "1" at 131.258,31.63 h1.27 r90; Top Overlay "2" at 128.718,31.63 h1.27 r90; Top Overlay "40" at 128.718,84.462 h1.27 r90; Top Overlay "39" at 131.258,84.462 h1.27 r90